# Altium PCB EEG_tDCS_PCB.PcbDoc (part 2 of 2)
Units mm, origin at the board's own origin, x right, y up, seen from the top; angles counter-clockwise.
Board outline 75 x 58.5 mm, 2 copper layers (Top Layer, Bottom Layer); 118 components, 65 nets, 367 pads, 142 vias.
Unrouted connection lines stored in the file: 2.
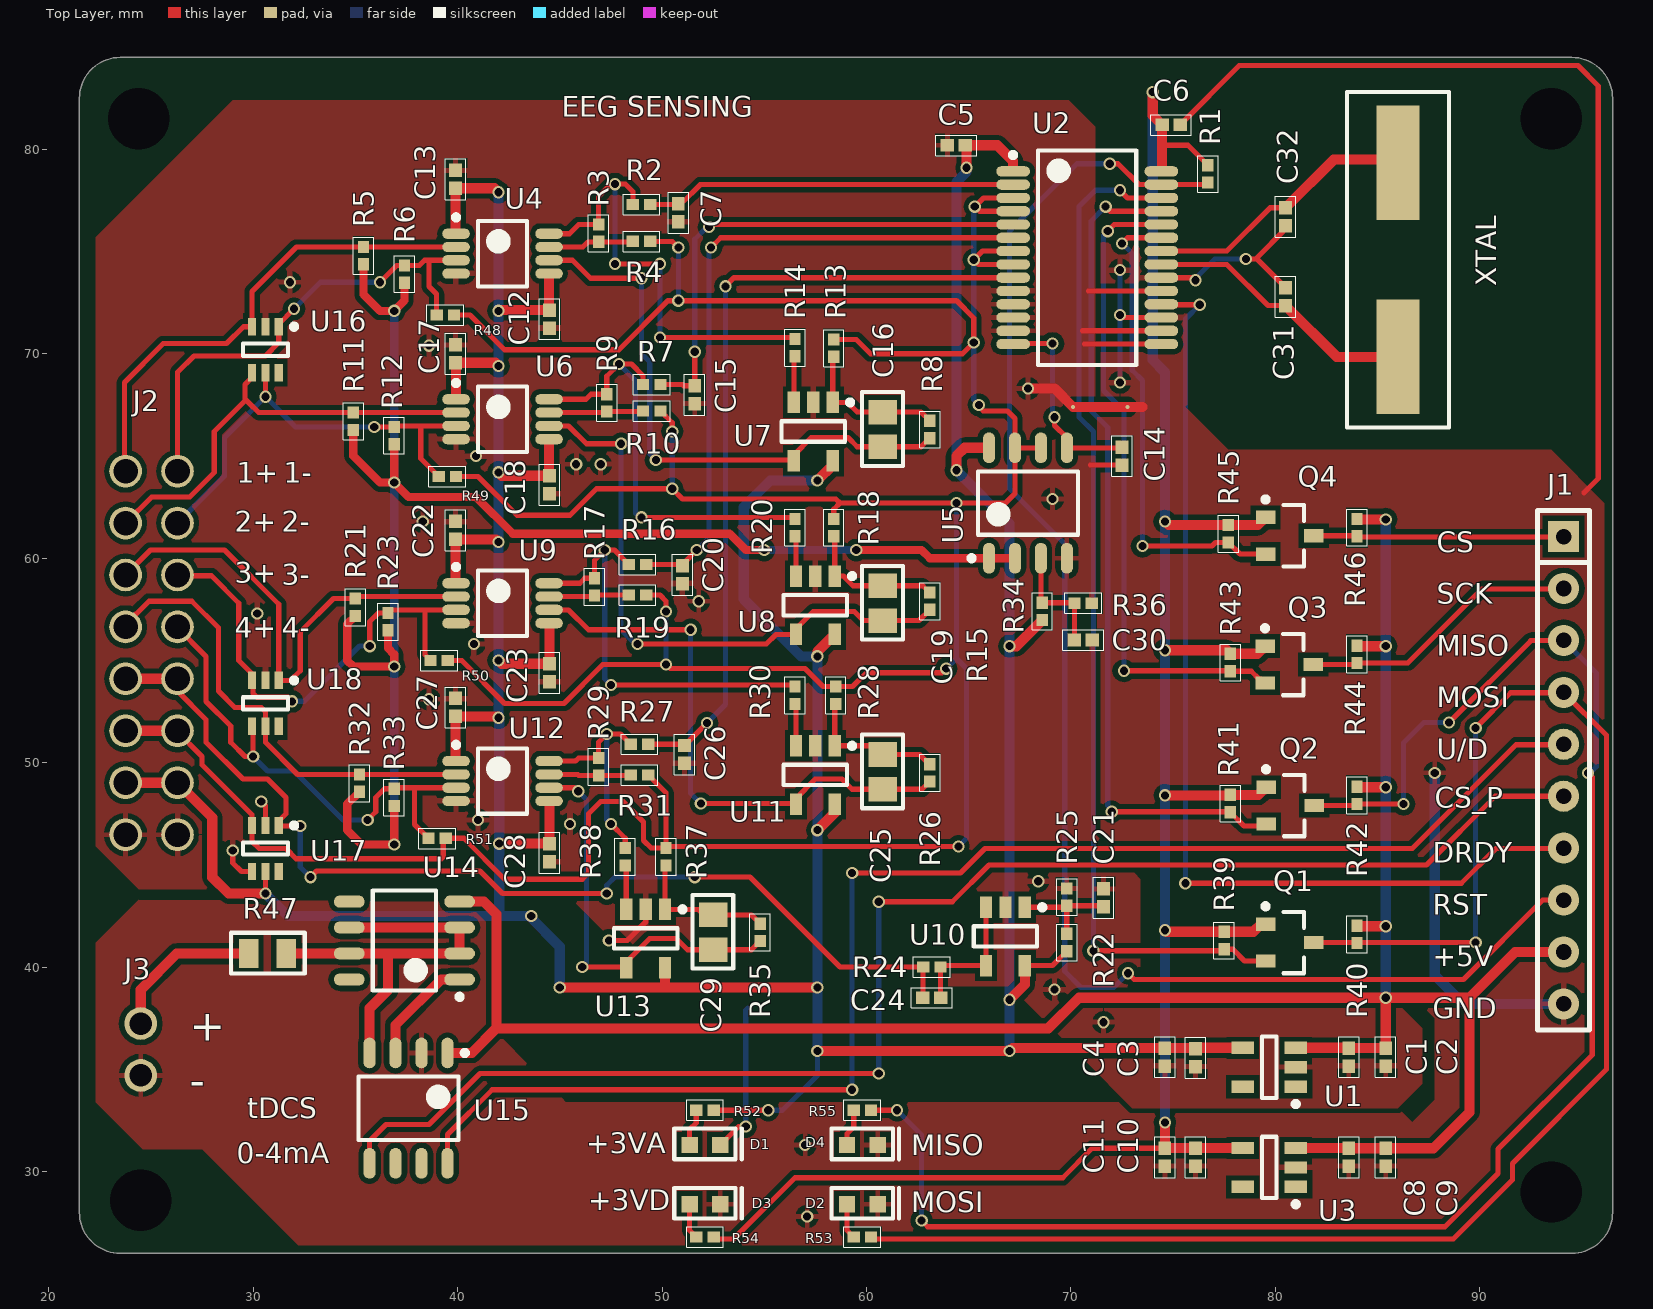
[diagram p0: Top Layer view]

## Via types
v1: diameter 0.6, hole 0.4, Top Layer to Bottom Layer, 142 vias

## Nets (pads, with @x,y where several pads share a name; then routed paths per layer and width w, separated by ;. In a path a pad name is that pad's centre, name@x,y a point inside that pad or via, vN(x,y) a via of type N, cw(c..) or ccw(c..) an arc to the next point about the centre after c; other vN are vias at no path point)
0_IN+: J2.9 R5.2 U4.2 U16.3 | length 24.3
  Top Layer w0.254: J2.9@23.7,64.26 23.7,68.6 25.6,70.5 28.7,70.5 29.525,71.325 U16.3 29.95,73.05 32.125,75.225 R5.2 U4.2
0_IN-: J2.1 R6.2 R48.1 U4.3 U16.1 | length 24.1
  Top Layer w0.254: J2.1 26.3,69.1 27.1,69.9 30.6,69.9 31.25,70.55 U16.1 31.25,71.45 v1(32,72.2) ; v1(36.2,73.5) 37.025,74.325 R6.2 38.125,74.325 38.375,74.575 38.6,74.575 ; R48.1 38.975,72.925 38.6,73.3 38.6,74.575 ; U4.3 38.6,74.575
  Bottom Layer w0.254: v1(32,72.2) 33.3,73.5 v1(36.2,73.5)
1_IN+: J2.10 R11.2 U6.2 U16.4 | length 21.6
  Top Layer w0.254: J2.10 25.04,63 26.9,63 28.1,64.2 28.1,66.2 29.65,67.75 ; U16.4 29.95,68.85 29.6,68.5 29.6,67.8 29.65,67.75 ; U6.2 R11.2 30.275,67.125 29.8,67.6 29.65,67.75
1_IN-: J2.2 R12.2 R49.1 U6.3 U16.5 | length 21.9
  Top Layer w0.254: v1(30.6,67.9) U16.5 ; v1(35.925,66.425) R12.2 36.95,66.475 38.2,66.475 ; R49.1 38.2,64.875 38.2,66.475 ; U6.3 38.2,66.475
  Bottom Layer w0.254: J2.2 28.6,64.02 28.6,65.9 v1(30.6,67.9) 32.075,66.425 v1(35.925,66.425)
2_IN+: J2.11 R21.2 U9.2 U18.1 | length 24.3
  Top Layer w0.254: J2.11 24.98,60.4 28.6,60.4 31.25,57.75 U18.1 31.825,54.025 32.3,54.5 32.3,56.4 33.925,58.025 R21.2 35.1,58.125 U9.2
2_IN-: J2.3 R23.2 R50.1 U9.3 U18.3 | length 23.5
  Top Layer w0.254: J2.3@26.26,59.14 27.96,59.14 29.3,57.8 29.3,55 29.95,54.35 U18.3 ; U18.3@30,54.025 30,53.4 30.2,53.2 31.7,53.2 v1(31.9,53) ; v1(35.7,55.7) 35.7,56.9 36.125,57.325 R23.2 36.75,57.475 38.4,57.475 ; R50.1 38.4,55.275 38.4,57.475 ; U9.3 38.4,57.475
  Bottom Layer w0.254: v1(31.9,53) 32.5,53 35.2,55.7 v1(35.7,55.7)
3_IN+: J2.12 R32.2 U12.2 U18.5 | length 23
  Top Layer w0.254: J2.12 23.76,56.76 24.9,57.9 27,57.9 28.3,56.6 28.3,53.5 29.1,52.7 30.4,52.7 30.6,52.5 U18.5 30.6,51 32.175,49.425 R32.2 U12.2
3_IN-: J2.4 R33.2 R51.1 U12.3 U18.4 | length 24.6
  Top Layer w0.254: J2.4@26.26,56.64 27.7,55.2 27.7,53 28.9,51.8 28.9,51 29.6,50.3 v1(30,50.3) 30,51.725 U18.4 ; v1(35.6,47.2) 36,47.6 36,48.3 36.425,48.725 R33.2 36.95,48.775 37.9,48.775 ; R51.1 37.9,46.975 37.9,48.775 ; U12.3 37.9,48.775
  Bottom Layer w0.254: v1(30,50.3) 30.7,49.6 32,49.6 34.4,47.2 v1(35.6,47.2)
+3V: C6.2 C10.2 C11.2 Q1.1 Q2.1 Q3.1 Q4.1 R1.2 R39.2 R41.2 R43.2 R45.2 R54.1 U2.28 U3.4 | length 106.5
  Top Layer w0.254: R54.1 52.625,26.7 53.5,26.7 56.5,29.7 69.6,29.7 71.04,31.14 C11.2 ; 74.46,80.2 75.725,80.2 R1.2
  Top Layer w0.5: v1(74,82.8) 74,81.66 C6.2 74.46,80.2 U2.28@74.46,79.1 ; C11.2 v1(74.6,32.4) ; v1(74.6,41.8) 74.675,41.725 R39.2 78.925,41.725 79.3,42.1 Q1.1 ; v1(74.6,48.4) 77.775,48.4 R41.2 79.175,48.425 Q2.1 ; v1(74.6,55.5) 77.625,55.5 R43.2 79.125,55.325 Q3.1 ; v1(74.6,61.8) 74.775,61.625 R45.2 79.15,61.625 Q4.1 ; C11.2@74.81,31.15 U3.4
  Bottom Layer w0.5: v1(74,82.8) 74,69.7 74.6,69.1 v1(74.6,61.8) v1(74.6,55.5) v1(74.6,48.4) v1(74.6,41.8) v1(74.6,32.4)
+3VA: C3.2 C4.2 C5.2 C12.2 C13.2 C17.2 C18.2 C22.2 C23.2 C27.2 C28.2 J2.7 J2.15 R22.2 R34.2 R52.1 U1.4 U2.1 U4.1 U4.5 U5.8 U6.1 U6.5 U7.5 U8.5 U9.1 U9.5 U10.5 U11.5 U12.1 U12.5 U13.5 U17.5 | length 234.5
  Top Layer w0.254: v1(30.6,43.6) U17.5 ; R52.1 v1(55.2,33) ; U10.5 69.1,40.075 R22.2 ; C3.2@76.06,36.04 C3.2
  Top Layer w0.5: J2.15 J2.7 28,47.32 28,44.4 28.8,43.6 v1(30.6,43.6) ; U9.1@39.9,58.856 C22.2 41.88,60.92 v1(42,60.8) ; U4.1@39.9,76 C13.2 41.8,78.1 v1(42,77.9) ; U12.1@39.925,50.2 39.9,50.225 C27.2 41.94,52.26 v1(42,52.2) ; U6.1@39.925,67.85 39.925,69.535 C17.2 41.84,69.56 v1(42,69.4) ; v1(42,55) 42.16,54.84 C23.2 U9.5@44.5,56.575 ; v1(42,64.2) 42.16,64.04 C18.2 44.475,64.065 U6.5@44.475,65.712 ; v1(42,72.1) 42.04,72.14 C12.2 44.475,72.165 U4.5@44.475,73.812 ; v1(42.04,46.04) C28.2 U12.5@44.5,47.875 ; v1(45,39) 50.1,39 ; U13.5 50.15,39.05 50.1,39 ; v1(57.6,35.9) v1(67,35.9) 67.14,36.04 C4.2 C3.2@76.06,36.04 ; v1(57.6,39) 50.1,39 ; v1(57.6,46.7) 58.45,47.55 U11.5 ; v1(57.6,55.2) 57.6,55.425 U8.5 ; v1(57.6,63.8) 58.35,64.55 U7.5 ; v1(64.4,64.3) 64.4,65 64.8,65.4 U5.8 ; v1(64.9,79.1) 64.9,80.14 C5.2 66.4,80.2 67.175,79.425 U2.1@67.175,79.1 ; v1(67,38.4) 67.75,39.15 U10.5 ; v1(67,55.7) 67.325,55.7 R34.2 ; C3.2 76.15,36.05 U1.4
  Bottom Layer w0.254: v1(55.2,33) 55.9,33 57.6,34.7 v1(57.6,35.9)
  Bottom Layer w0.5: v1(30.6,43.6) 31.7,42.5 42.04,42.5 ; v1(42,77.9) v1(42,72.1) v1(42,69.4) v1(42,64.2) v1(42,60.8) v1(42,55) v1(42,52.2) 42.04,52.16 v1(42.04,46.04) 42.04,42.5 ; v1(43.6,42.5) v1@43.5,42.5 ; v1(45,39) 45,41 v1@43.5,42.5 ; v1(57.6,35.9) v1(57.6,39) v1(57.6,46.7) v1(57.6,55.2) 56.8,55.2 54,58 54,62.5 55.3,63.8 v1(57.6,63.8) ; v1(64.9,79.1) 64.9,78.9 64.4,78.4 v1(64.4,64.3) 67,61.7 v1(67,55.7) v1(67,38.4) v1(67,35.9) ; 42.04,42.5 v1@43.5,42.5
+5V: C1.2 C2.2 C8.2 C9.2 J1.9 R40.2 R42.2 R44.2 R46.2 U1.1 U1.3 U3.1 U3.3 U14.4 U15.1 | length 114.8
  Top Layer w0.254: C1.2@83.41,36.05 C1.2@83.56,35.9
  Top Layer w0.5: U15.1 40.7,35.8 41.9,37 ; U14.4 41.295,43.205 41.9,42.6 41.9,37 ; U3.3 83.59,31.15 C8.2 C9.2 87.74,31.14 89.5,32.9 89.5,38.5 ; U1.3 C1.2@83.41,36.05 ; C1.2@83.5,36.04 C1.2 C2.2 ; R40.2 84.025,42 v1(85.4,42) ; R42.2 84.025,48.8 v1(85.4,48.8) ; R44.2 84.025,55.7 v1(85.4,55.7) ; R46.2 84.025,61.9 v1(85.4,61.9) ; C2.2@85.4,36.34 v1(85.4,38.5) ; J1.9 91.74,40.74 89.5,38.5 ; 41.9,37 68.9,37 70.4,38.5 v1(85.4,38.5) ; v1(85.4,38.5) 89.5,38.5
  Bottom Layer w0.5: v1(85.4,38.5) v1(85.4,42) v1(85.4,48.8) v1(85.4,55.7) v1(85.4,61.9)
AGND: ?.1 C1.1 C2.1 C3.1 C4.1 C5.1 C7.1 C12.1 C13.1 C14.1 C15.1 C17.1 C18.1 C20.1 C21.1 C22.1 C23.1 C26.1 C27.1 C28.1 C30.1 D1.2 J2.8 J2.16 R25.1 R36.1 U1.2 U2.10 U2.11 U2.12 U2.13 U2.15 U2.16 U2.19 U4.4 U5.4 U6.4 U7.2 U8.2 U9.4 U10.2 U11.2 U12.4 U13.2 U16.2 U17.2 U17.4 U18.2 | length 28.5
  Top Layer w0.254: v1(29,45.7) 29,45.1 29.425,44.675 U17.4 ; v1(30.4,48.1) 30.6,47.9 U17.2 ; v1(47.4,41.3) 48.3,41.3 49.2,42.2 U13.2 ; D1.2 53.75,32.2 v1(54.1,32.2) ; 70.575,71.125 U2.16 ; 70.675,70.475 U2.15 ; 70.875,73.075 U2.19 ; 70.96,64.56 C14.1
  Top Layer w0.5: v1(67.9,68.3) 69.203,68.3 ?.1
  Bottom Layer w0.254: v1(54.1,32.2) 54.1,37.9 54.2,38
  other v1: 71.6,37.3 69.2,38.9 68.4,44.2 45.5,47 41,47.2 38.6,53.1 40.8,55.8 30.2,57.3 51.8,57.9 38.3,61.8 69.1,62.9 45.8,64.6 47,64.6 40.9,65 38.6,70.4 31.8,73.5
CH0+: C7.2 R2.2 U2.2 | length 18.2
  Top Layer w0.254: R2.2 50.76,77.3 C7.2 50.94,77.34 51.875,78.275 U2.2
CH1+: C15.2 R7.2 U2.5 | length 24.7
  Top Layer w0.254: R7.2 51,68.5 51.06,68.44 C15.2 v1(51.6,70.1) ; v1(52.3,76.2) 52.425,76.325 U2.5
  Bottom Layer w0.254: v1(51.6,70.1) 51.6,75.6 52.2,76.2 v1(52.3,76.2)
CH2+: C20.2 R16.2 U2.6 | length 32.9
  Top Layer w0.254: R16.2 50.94,59.7 C20.2 51,59.7 v1(51.7,60.4) ; v1(52.4,75.2) 52.875,75.675 U2.6
  Bottom Layer w0.254: v1(51.7,60.4) 52.3,61 52.3,75.1 v1(52.4,75.2)
CH3+: C26.2 R27.2 U2.9 | length 39.3
  Top Layer w0.254: R27.2 51.04,50.9 C26.2 v1(52.2,51.94) ; v1(53.1,73.3) 53.525,73.725 U2.9
  Bottom Layer w0.254: v1(52.2,51.94) 53.1,52.84 v1(53.1,73.3)
CS_3V: Q4.2 R45.1 U2.23 | length 23.5
  Top Layer w0.254: v1(72.5,75.4) 72.775,75.675 U2.23 ; v1(73.5,60.6) 76.9,60.6 77.075,60.775 R45.1 78.275,60.2 Q4.2
  Bottom Layer w0.254: v1(72.5,75.4) 73,74.9 73,69.2 73.5,68.7 v1@73.5,60.7
CS_5V: J1.1 Q4.3 R46.1 | length 12.2
  Top Layer w0.254: Q4.3 84.075,61.1 84.135,61.04 J1.1@94.1,61.04
CS_POT: J1.6 U15.5 | length 71.4
  Top Layer w0.254: U15.5 35.695,31.495 36.5,32.3 38.6,32.3 41.1,34.8 v1(60.6,34.8) ; v1(60.6,43.2) 64.2,43.2 66,45 87.4,45 90.76,48.36 J1.6
  Bottom Layer w0.254: v1(60.6,34.8) v1(60.6,43.2)
CURRENT_BIAS: R5.1 R6.1 R11.1 R12.1 R21.1 R23.1 R32.1 R33.1 U5.1 U5.2 | length 81.8
  Top Layer w0.4: R11.1 34.9,65 36.2,63.7 v1(36.9,63.7) ; R21.1 34.6,56.775 34.6,55 34.9,54.7 v1(36.9,54.7) 36.9,55.3 36.6,55.6 R23.1 ; R32.1 34.6,47.975 34.6,46.7 35.3,46 v1(36.9,46) R33.1 ; R5.1 35.4,72.9 36.2,72.1 v1(36.9,72.1) 37.4,72.6 R6.1 ; R12.1 v1(36.9,63.7) ; v1(55,60.4) 54.1,60.4 53.3,61.2 42.7,61.2 40.9,63 37.6,63 v1(36.9,63.7) ; v1(59.5,60.4) 62.7,60.4 63.1,60 U5.1 U5.2
  Bottom Layer w0.4: v1(36.9,46) v1(36.9,54.7) v1(36.9,63.7) v1(36.9,72.1) ; v1(55,60.4) v1(59.5,60.4)
DRDY: J1.7 U2.18 | length 49.7
  Top Layer w0.254: U2.18 74.45,72.4 v1(76.3,72.4) ; v1(75.6,44.1) 89.1,44.1 90.8,45.8 J1.7@94.1,45.8
  Bottom Layer w0.254: v1(75.6,44.1) 75.6,71.7 v1(76.3,72.4)
DRIVEN_GND: C24.2 J2.5 J2.13 R24.1 U17.1 | length 51
  Top Layer w0.254: J2.5 26.3,53.5 27.7,52.1 27.7,51 29.5,49.2 30.7,49.2 31.6,48.3 31.6,47.5 31.25,47.15 U17.1 31.275,46.9 v1(32.3,46.9) ; v1(32.8,44.4) 33.1,44.7 41.1,44.7 42.2,43.6 v1(47.3,43.6) ; v1(51.6,44.4) 54.3,44.4 58.7,40 R24.1 62.76,39.985 C24.2
  Top Layer w0.5: J2.13 J2.5
  Bottom Layer w0.254: v1(32.3,46.9) 32.3,44.9 v1(32.8,44.4) ; v1(47.3,43.6) 47.3,44 47.7,44.4 v1(51.6,44.4)
GND: ?.2 C6.1 C8.1 C9.1 C10.1 C11.1 C31.1 C32.1 D2.2 D3.2 D4.2 J1.10 J3.2 U2.17 U2.20 U3.2 U15.2 | length 76.7
  Top Layer w0.254: v1(72.4,71.9) 72.525,71.775 U2.17 ; U2.20 75.975,73.725 v1(76.1,73.6) ; C6.1 78.24,84.1 94.8,84.1 95.8,83.1 95.8,63.9 95.1,63.2 ; v1(78.56,74.64) 79.1,74.64 ; C31.1 79.1,74.64 ; C32.1 80.5,76.1 79.1,74.7 79.1,74.64
  Top Layer w0.5: ?.2 73.5,67.4
  Bottom Layer w0.254: v1(72.4,68.6) v1(72.4,71.9) v1(72.4,74.1) ; v1(76.1,73.6) 76.1,73.7 77.04,74.64 v1(78.56,74.64)
  Bottom Layer w0.5: v1(87.8,49.5) 87.8,39.6 89.2,38.2 J1.10
  other v1: 57.1,27.8 57,31.3
MISO_3V: Q2.2 R41.1 U2.25 | length 40.9
  Top Layer w0.254: v1(71.7,77.2) 71.925,76.975 U2.25 ; v1(72,47.6) 77.775,47.6 R41.1 78.475,46.9 79.45,46.9 Q2.2
  Bottom Layer w0.254: v1(71.7,77.2) 71,76.5 71,67.2 71.8,66.4 71.8,47.9 v1@72,47.7
MISO_5V: J1.3 Q2.3 R42.1 R55.1 | length 82.6
  Top Layer w0.254: R55.1 v1(61.5,33) ; v1(62.7,27.6) 63,27.3 88.3,27.3 90.9,29.9 90.9,31.1 95.5,35.7 95.5,49.3 v1(95.3,49.5) ; Q2.3 83.925,47.9 R42.1 v1(86.275,47.975) ; v1(88.5,51.96) 92.5,55.96 cw(c92.52,55.96) 92.52,55.98 J1.3
  Bottom Layer w0.254: v1(61.5,33) 62.7,31.8 v1(62.7,27.6) ; v1(86.275,47.975) 86.275,50.975 87.26,51.96 v1(88.5,51.96) ; J1.3 95.7,54.38 95.7,49.8 v1@95.5,49.6
MOSI_3V: Q1.2 R39.1 U2.26 | length 49.9
  Top Layer w0.254: v1(71.1,40.8) 77.425,40.8 R39.1 77.925,40.875 78.5,40.3 Q1.2 ; v1(72.4,78) 72.775,77.625 U2.26
  Bottom Layer w0.254: v1(71.1,40.8) 71.1,66.2 70.4,66.9 70.4,77.2 71.2,78 v1(72.4,78)
MOSI_5V: J1.4 Q1.3 R40.1 R53.1 | length 82.7
  Top Layer w0.254: R53.1 60.325,26.7 88.7,26.7 91.6,29.6 91.6,30.4 96.2,35 96.2,51.34 J1.4 ; Q1.3 83.975,41.2 R40.1 84.025,41.2 v1(89.8,41.2) ; v1(89.8,51.7) 91.52,53.42 J1.4@94.1,53.42
  Bottom Layer w0.254: v1(89.8,41.2) v1(89.8,51.7)
NetC14_2: C14.2 U2.14 U5.5 | length 10.2
  Top Layer w0.254: U2.14 67.2,70.5 v1(69.1,70.5) ; v1(69.2,66.9) 69.2,66.5 69.805,65.895 U5.5 72.46,65.4 C14.2
  Bottom Layer w0.254: v1(69.1,70.5) 69.1,67 v1(69.2,66.9) v1@69.325,66.775
NetC16_2: C16.2 R8.2 R13.1 U7.1 | length 7.4
  Top Layer w0.254: R13.1 58.35,69.8 U7.1 59.075,67.625 59.55,67.15 C16.2 62.675,67.15 R8.2
NetC19_2: C19.2 R15.2 R18.1 U8.1 | length 6.9
  Top Layer w0.254: R18.1 58.45,61.025 U8.1 58.875,59.125 59.35,58.65 C19.2 62.75,58.65 R15.2@63.087,58.312
NetC21_2: C21.2 R22.1 R25.2 U10.1 | length 5.3
  Top Layer w0.254: U10.1 69.725,42.925 R25.2 ; R22.1 R25.2 ; C21.2 71.56,43 R25.2
NetC24_1: C24.1 R24.2 U10.3 U10.4 | length 6.6
  Top Layer w0.254: C24.1 63.625,38.515 R24.2 63.7,40.075 U10.4 U10.3
NetC25_2: C25.2 R26.2 R28.1 U11.1 | length 7.1
  Top Layer w0.254: R28.1 58.45,52.825 U11.1 60.375,50.825 C25.2 62.6,50.4 R26.2@63.087,49.913
NetC29_2: C29.2 R35.2 R37.1 U13.1 | length 7.1
  Top Layer w0.254: R37.1 50.15,44.925 U13.1 51.775,42.825 52.05,42.55 C29.2 54.375,42.55 R35.2
NetC30_2: C30.2 R34.1 R36.2 U5.3 | length 5.5
  Top Layer w0.254: R34.1@68.535,57.86 U5.3 ; R34.1 70.15,57.825 R36.2 70.175,56.015 C30.2
NetC31_2: C31.2 U2.21 XTAL.1 | length 13.4
  Top Layer w0.254: U2.21 77.625,74.375 79.64,72.36 C31.2
  Top Layer w0.5: C31.2 83.01,69.85 XTAL.1
NetC32_2: C32.2 U2.22 XTAL.2 | length 13.7
  Top Layer w0.254: U2.22 77.625,75.025 79.74,77.14 C32.2
  Top Layer w0.5: C32.2 82.86,79.5 85.35,79.5 XTAL.2@86,78.85
NetD1_1: D1.1 R52.2 | length 1.8
  Top Layer w0.254: D1.1 51.35,32.05 51.675,32.375 R52.2
NetD2_1: D2.1 R53.2 | length 1.7
  Top Layer w0.254: D2.1 59.05,27.125 R53.2
NetD3_1: D3.1 R54.2 | length 1.7
  Top Layer w0.254: D3.1 51.35,27.125 R54.2
NetD4_1: D4.1 R55.2 | length 1.8
  Top Layer w0.254: D4.1 59.05,31.85 59.375,32.175 R55.2
NetJ3_1: J3.1 R47.1 | length 7.5
  Top Layer w0.5: J3.1@24.5,37.4 24.5,38.9 26.265,40.665 R47.1
NetR3_1: R3.1 R4.2 U4.7 | length 4.2
  Top Layer w0.254: U4.7 46.125,75.225 46.375,75.475 R3.1 48.55,75.475 R4.2
NetR9_1: R9.1 R10.2 U6.7 | length 4.6
  Top Layer w0.254: U6.7 47.25,67.125 R9.1 49.05,67.175 R10.2
NetR14_1: R14.1 U7.3 | length 2.3
  Top Layer w0.254: U7.3 56.45,69.825 R14.1
NetR17_1: R17.1 R19.2 U9.7 | length 3.9
  Top Layer w0.254: U9.7 46.55,58.125 46.625,58.2 R19.2
NetR20_1: R20.1 U8.3 | length 2
  Top Layer w0.254: R20.1 56.55,61.025 U8.3
NetR29_1: R29.1 R31.2 U12.7 | length 4.1
  Top Layer w0.254: U12.7 45.875,49.425 45.925,49.375 R29.1 48.4,49.375 R31.2@48.475,49.3
NetR30_1: R30.1 U11.3 | length 2.1
  Top Layer w0.254: R30.1 56.55,52.825 U11.3
NetR38_1: R38.1 U13.3 | length 2.2
  Top Layer w0.254: R38.1 48.25,44.925 U13.3
NetR47_2: R47.2 U14.2 U14.3 U14.6 U14.7 U15.4 | length 20.4
  Top Layer w0.5: R47.2 U14.7 36.6,40.665 ; U14.6 U14.3 U14.2 36.6,40.665 ; U15.4 35.695,37.995 36.6,38.9 36.6,40.665
NetU14_1: U14.1 U15.3 | length 5.4
  Top Layer w0.5: U15.3 36.965,37.165 39.195,39.395 U14.1
REF_0: C16.1 R8.1 U4.6 U7.4 | length 28.5
  Top Layer w0.254: U4.6 45.625,74.575 46.5,73.7 v1(49,73.7) ; v1(49.7,64.8) 56.425,64.8 U7.4 56.45,65.05 57.3,65.9 59.1,65.9 59.55,65.45 C16.1 62.675,65.45 R8.1
  Bottom Layer w0.254: v1(49,73.7) 49,70 49.4,69.6 49.4,65.1 v1(49.7,64.8)
REF_1: C19.1 R15.1 U6.6 U8.4 | length 29.6
  Top Layer w0.254: U6.6 45.425,66.475 46.3,65.6 v1(48,65.6) ; v1(48.8,55.8) 55.1,55.8 55.575,56.275 U8.4 56.55,56.55 57.4,57.4 59.4,57.4 59.85,56.95 C19.1 62.575,56.95 R15.1
  Bottom Layer w0.254: v1(48,65.6) 48,56.5 48.7,55.8 v1(48.8,55.8)
REF_2: C25.1 R26.1 U9.6 U11.4 | length 28.3
  Top Layer w0.254: U9.6 45.425,57.475 46.4,56.5 v1(51.4,56.5) ; v1(51.9,48) 56.525,48 U11.4 56.55,48.25 57.5,49.2 58.8,49.2 59.3,48.7 C25.1 62.725,48.7 R26.1
  Bottom Layer w0.254: v1(51.4,56.5) 51.4,48.5 v1(51.9,48)
REF_3: C29.1 R35.1 U12.6 U13.4 | length 20.2
  Top Layer w0.254: U12.6 45.725,48.775 v1(45.9,48.6) ; v1(46.1,40) 48.225,40 U13.4 48.25,40.25 49.4,41.4 50.7,41.4 51.25,40.85 C29.1 54.375,40.85 R35.1
  Bottom Layer w0.254: v1(45.9,48.6) 46.3,48.2 46.3,40.2 v1(46.1,40)
RST: J1.8 R1.1 U2.27 | length 75.6
  Top Layer w0.254: v1(71.9,79.3) 72.3,79.3 73.325,78.275 U2.27 76.6,78.275 R1.1 ; v1(72.8,39.7) 73.1,39.4 89.2,39.4 93.08,43.28 J1.8
  Bottom Layer w0.254: v1(71.9,79.3) 70.3,79.3 67,76 67,63.4 69.7,60.7 69.7,39.8 70.5,39 72.1,39 v1(72.8,39.7)
SCK_3V: Q3.2 R43.1 U2.24 | length 31.9
  Top Layer w0.254: v1(71.8,76) 72.125,76.325 U2.24 ; v1(72.6,54.5) 77.775,54.5 R43.1 78.825,54.475 79.2,54.1 79.3,54.1 Q3.2
  Bottom Layer w0.254: v1(71.8,76) 71.6,75.8 71.6,68.2 72.6,67.2 v1(72.6,54.5)
SCK_5V: J1.2 Q3.3 R44.1 | length 13.8
  Top Layer w0.254: Q3.3 R44.1@84,54.8 ; R44.1 86.475,54.875 90.1,58.5 J1.2@94.1,58.5
UPDOWN: J1.5 U15.8 | length 70.1
  Top Layer w0.254: U15.8 39.505,31.805 41.7,34 v1(59.3,34) ; v1(59.3,44.6) 64.6,44.6 65.8,45.8 86.7,45.8 91.78,50.88 J1.5@94.1,50.88
  Bottom Layer w0.254: v1(59.3,34) v1(59.3,44.6)
V_REF: J2.6 J2.14 R4.1 R10.1 R13.2 R18.2 R19.1 R28.2 R31.1 R37.2 R48.2 R49.2 R50.2 R51.2 U2.3 U2.4 U2.7 U2.8 U5.6 U5.7 U17.3 | length 202.4
  Top Layer w0.254: J2.6@26.24,51.56 27.5,50.3 27.5,49.9 29.95,47.45 U17.3 29.95,46.15 30.3,45.8 31.6,45.8 32.1,45.3 39.2,45.3 39.3,45.4 39.3,46.175 R51.2 40.3,46.3 42.3,44.3 46.1,44.3 46.4,44.6 46.4,47.5 47,48.1 48.1,48.1 49.1,47.1 49.1,46.2 49.475,45.825 R37.2 50.275,45.9 v1(64.5,45.9) ; R50.2 40.2,55 42.3,52.9 45.2,52.9 47.1,54.8 v1(50.2,54.8) 50.4,54.6 57,54.6 57.875,53.725 R28.2 59.325,53.725 60,54.4 63.7,54.4 v1(63.9,54.6) ; R48.2 40.6,71.9 42.3,70.2 47.9,70.2 50.3,72.6 v1(50.8,72.6) 64.4,72.6 65.25,71.75 v1(65.25,70.55) 64.7,70 60.2,70 59.5,70.7 R13.2 ; R49.2 41,64 42.9,62.1 45.5,62.1 46.8,63.4 v1(50.5,63.4) 51,62.9 58.5,62.9 58.7,62.7 ; R19.1 49.9,58.2 50.2,57.9 v1(50.2,57.4) ; R31.1 50.2,48.525 R37.2@50.2,46 ; R4.1 50.5,75.5 v1(50.8,75.2) ; R10.1 50.5,66.625 v1(50.5,66.2) ; R18.2 58.4,62.4 58.7,62.7 ; 65.7,67.2 66.9,67.2 67.265,66.835 U5.7 ; U2.8 65.475,74.375 v1(65.25,74.6) 65.675,75.025 U2.7 ; U2.4 65.525,76.975 v1(65.3,77.2) 65.725,77.625 U2.3 ; U5.6 U5.7 ; 58.7,62.7 v1(64.4,62.7) 66.8,62.7 67.265,63.165 U5.7
  Top Layer w0.5: J2.14 26.24,51.56 J2.6
  Bottom Layer w0.254: v1(50.2,54.8) v1(50.2,57.4) ; v1(50.5,63.4) v1(50.5,66.2) ; v1(50.8,72.6) v1(50.8,75.2) ; v1(63.9,54.6) 64.4,55.1 ; v1(64.4,62.7) 64.4,55.1 ; v1(64.5,45.9) 64.9,46.3 64.9,54.6 64.4,55.1 ; v1(65.3,77.2) 65.25,77.15 v1(65.25,74.6) v1(65.25,70.55) 65.25,67.75 v1(65.5,67.5)
VOUT_0: R2.1 R3.2 R14.2 U4.8 | length 22.8
  Top Layer w0.254: U4.8 45.475,75.875 45.925,76.325 R3.2 46.9,77.7 47.5,78.3 v1(47.7,78.3) 48.2,78.3 48.575,77.925 R2.1 ; v1(47.7,74.4) v1(49.9,74.4) ; v1(49.9,70.8) R14.2@56.325,70.8
  Bottom Layer w0.254: v1(47.7,74.4) v1(47.7,78.3) ; v1(49.9,70.8) v1(49.9,74.4)
VOUT_1: R7.1 R9.2 R20.2 U6.8 | length 21.8
  Top Layer w0.254: U6.8 46.275,67.775 46.525,68.025 R9.2 47.3,68.9 v1(47.9,69.5) 48.5,69.5 49.075,68.925 R7.1 ; v1(49,62) 56.425,62 R20.2
  Bottom Layer w0.254: v1(47.9,69.5) 48.7,68.7 48.7,62.2 v1@48.8,62.1
VOUT_2: R16.1 R17.2 R30.2 U9.8 | length 21.1
  Top Layer w0.254: U9.8 45.975,58.775 46.225,59.025 R17.2 46.7,59.9 v1(47.2,60.4) 47.675,60.4 R16.1 ; v1(47.5,53.8) 56.425,53.8 R30.2
  Bottom Layer w0.254: v1(47.2,60.4) 47.2,54.1 v1(47.5,53.8)
VOUT_3: R27.1 R29.2 R38.2 U12.8 | length 11.2
  Top Layer w0.254: U12.8 45.775,50.075 45.925,50.225 R29.2 46.9,51 v1(47.3,51.4) 47.975,51.4 R27.1 ; v1(47.5,47) 48.2,46.3 R38.2
  Bottom Layer w0.254: v1(47.3,51.4) 47.3,47.2 v1(47.5,47)
pads on no net: U1.5 U3.5 U14.5 U14.8 U15.6 U15.7 U16.6 U17.6 U18.6

## Polygon pours and split planes (outlines as drawn)
GND on Top Layer "GND" (solid, remove dead copper, pour order 4): 24.4,43.3 22.3,41.2 22.3,33.4 24.6,31.1 27.5,31.1 32.2,26.4 88.9,26.4 91.5,29 91.5,32.1 96.1,36.7 96.1,62.7 93.5,65.3 77.7,65.3 75.6,67.4 75.7,67.5 75.7,81.7 74.9,82.5 74.8,82.4 72.6,82.4 71.3,81.1 71.3,46.8 75.7,42.4 75.7,40.1 76.8,39 86.3,39 87.8,37.5 87.8,33.5 86.7,32.4 85.7,33.4 45.3,33.4 41.8,36.9 41.8,41.9 41.7,41.9 40.4,43.2
AGND on Top Layer "AGND" (solid, remove dead copper, pour order 0): 47.1,41.8 47.9,41.8 50.636,39.064 67.036,39.064 73,33.1 86,33.1 87.2,34.3 87.2,37 85.6,38.6 74.4,38.6 73.4,39.6 73.4,44.3 71.2,46.498 71.2,81.1 69.9,82.4 29,82.4 22.3,75.7 22.3,45.9 24.197,44.003 24.4,43.8 45.1,43.8
GND on Bottom Layer "GND" (solid, remove dead copper, pour order 6): 60.4,32.2 60.2,32.4 56.7,32.4 56,31.7 56,27.1 56.3,26.8 61.3,26.8 61.9,27.4 61.9,31.8 61.4,32.3
AGND on Bottom Layer "AGND" (solid, remove dead copper, pour order 2): 22.3,75.7 22.3,45.9 24.2,44 33,44 43.5,44 49.7,37.8 68.3,37.8 70,36.1 71.7,36.1 71.7,36.2 73.3,37.8 73.3,44.7 71.4,46.6 71.45,80.85 69.9,82.4 29,82.4

## Silkscreen, mask and mechanical layers (free items; w line width, h text height)
Top Overlay:
  text "EEG SENSING" at 45.1,81.6 h1
  text "1+" at 29.2,63.7 h1
  text "1-" at 31.5,63.7 h1
  text "2+" at 29.1,61.3 h1
  text "2-" at 31.4,61.3 h1
  text "CS" at 87.9,60.3 h1
  text "3+" at 29.1,58.8 h1
  text "3-" at 31.4,58.7 h1
  text "SCK" at 87.9,57.767 h1
  text "4+" at 29.1,56.1 h1
  text "4-" at 31.4,56.1 h1
  text "MISO" at 87.9,55.233 h1
  text "MOSI" at 87.9,52.7 h1
  text "U/D" at 87.9,50.167 h1
  text "CS_P" at 87.8,47.8 h1
  text "DRDY" at 87.7,45.1 h1
  text "RST" at 87.7,42.567 h1
  text "+5V" at 87.7,40.033 h1
  text "GND" at 87.7,37.5 h1
  text "+" at 26.9,36.4 h1.52
  text "-" at 26.9,33.7 h1.52
  text "tDCS" at 29.7,32.6 h1
  text "+3VA" at 46.3,30.9 h1
  text "MISO" at 62.2,30.8 h1
  text "0-4mA" at 29.2,30.4 h1
  text "+3VD" at 46.4,28.1 h1
  text "MOSI" at 62.2,28 h1
Bottom Overlay:
  text "1+" at 30.5,63.7 h1
  text "1-" at 32.8,63.7 h1
  text "2+" at 30.7,61.3 h1
  text "2-" at 33,61.3 h1
  text "CS" at 90.7,60.3 h1
  text "3+" at 30.7,58.8 h1
  text "3-" at 33,58.7 h1
  text "SCK" at 90.7,57.8 h1
  text "4+" at 30.7,56.1 h1
  text "4-" at 33,56.1 h1
  text "MISO" at 90.7,55.2 h1
  text "DRIVEN GROUND" at 41.3,53.7 h1
  text "MOSI" at 90.7,52.7 h1
  text "VREF" at 32.6,51.1 h1
  text "U/D" at 90.7,50.2 h1
  text "+3VA" at 33,48.6 h1
  text "CS_P" at 90.7,47.8 h1
  text "GND" at 32,46.1 h1
  text "DRDY" at 90.7,45.1 h1
  text "RST" at 90.6,42.5 h1
  text "+5V" at 90.5,40.1 h1
  text "GND" at 90.3,37.6 h1
  text "+" at 26.9,36.4 h1.52
  text "-" at 26.9,33.7 h1.52
Mechanical 1:
  the board outline again, w0.05